# Altium PCB PCB2.PcbDoc
Units mm, origin at the board's own origin, x right, y up, seen from the top; angles counter-clockwise.
Board outline 100 x 100 mm, 2 copper layers (Top Layer, Bottom Layer); 7 components, 16 nets, 76 pads, 4 vias.
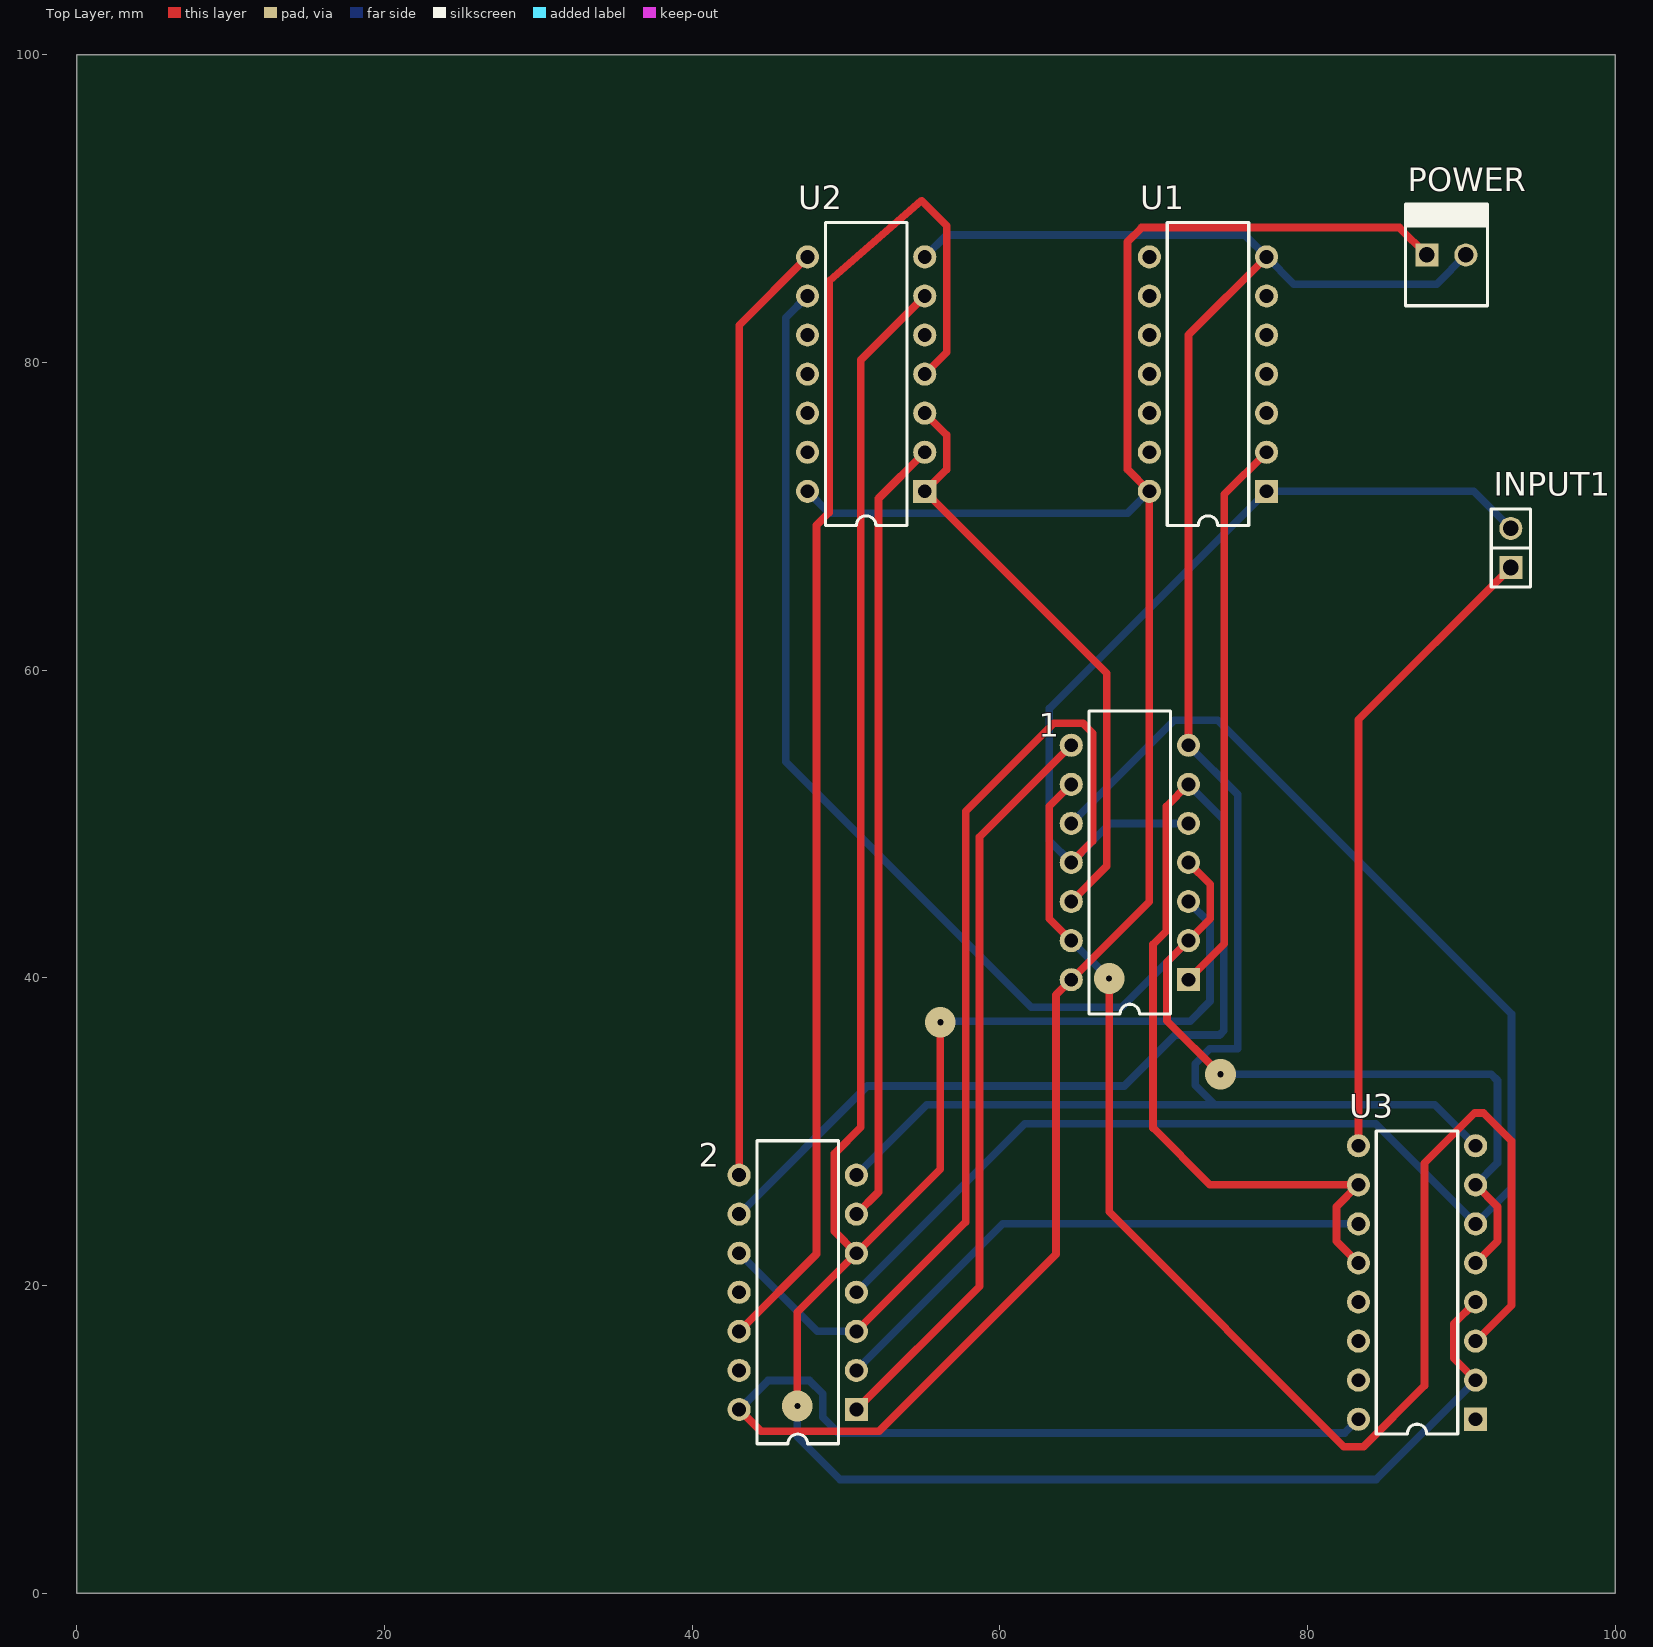
[diagram p0: Top Layer view]
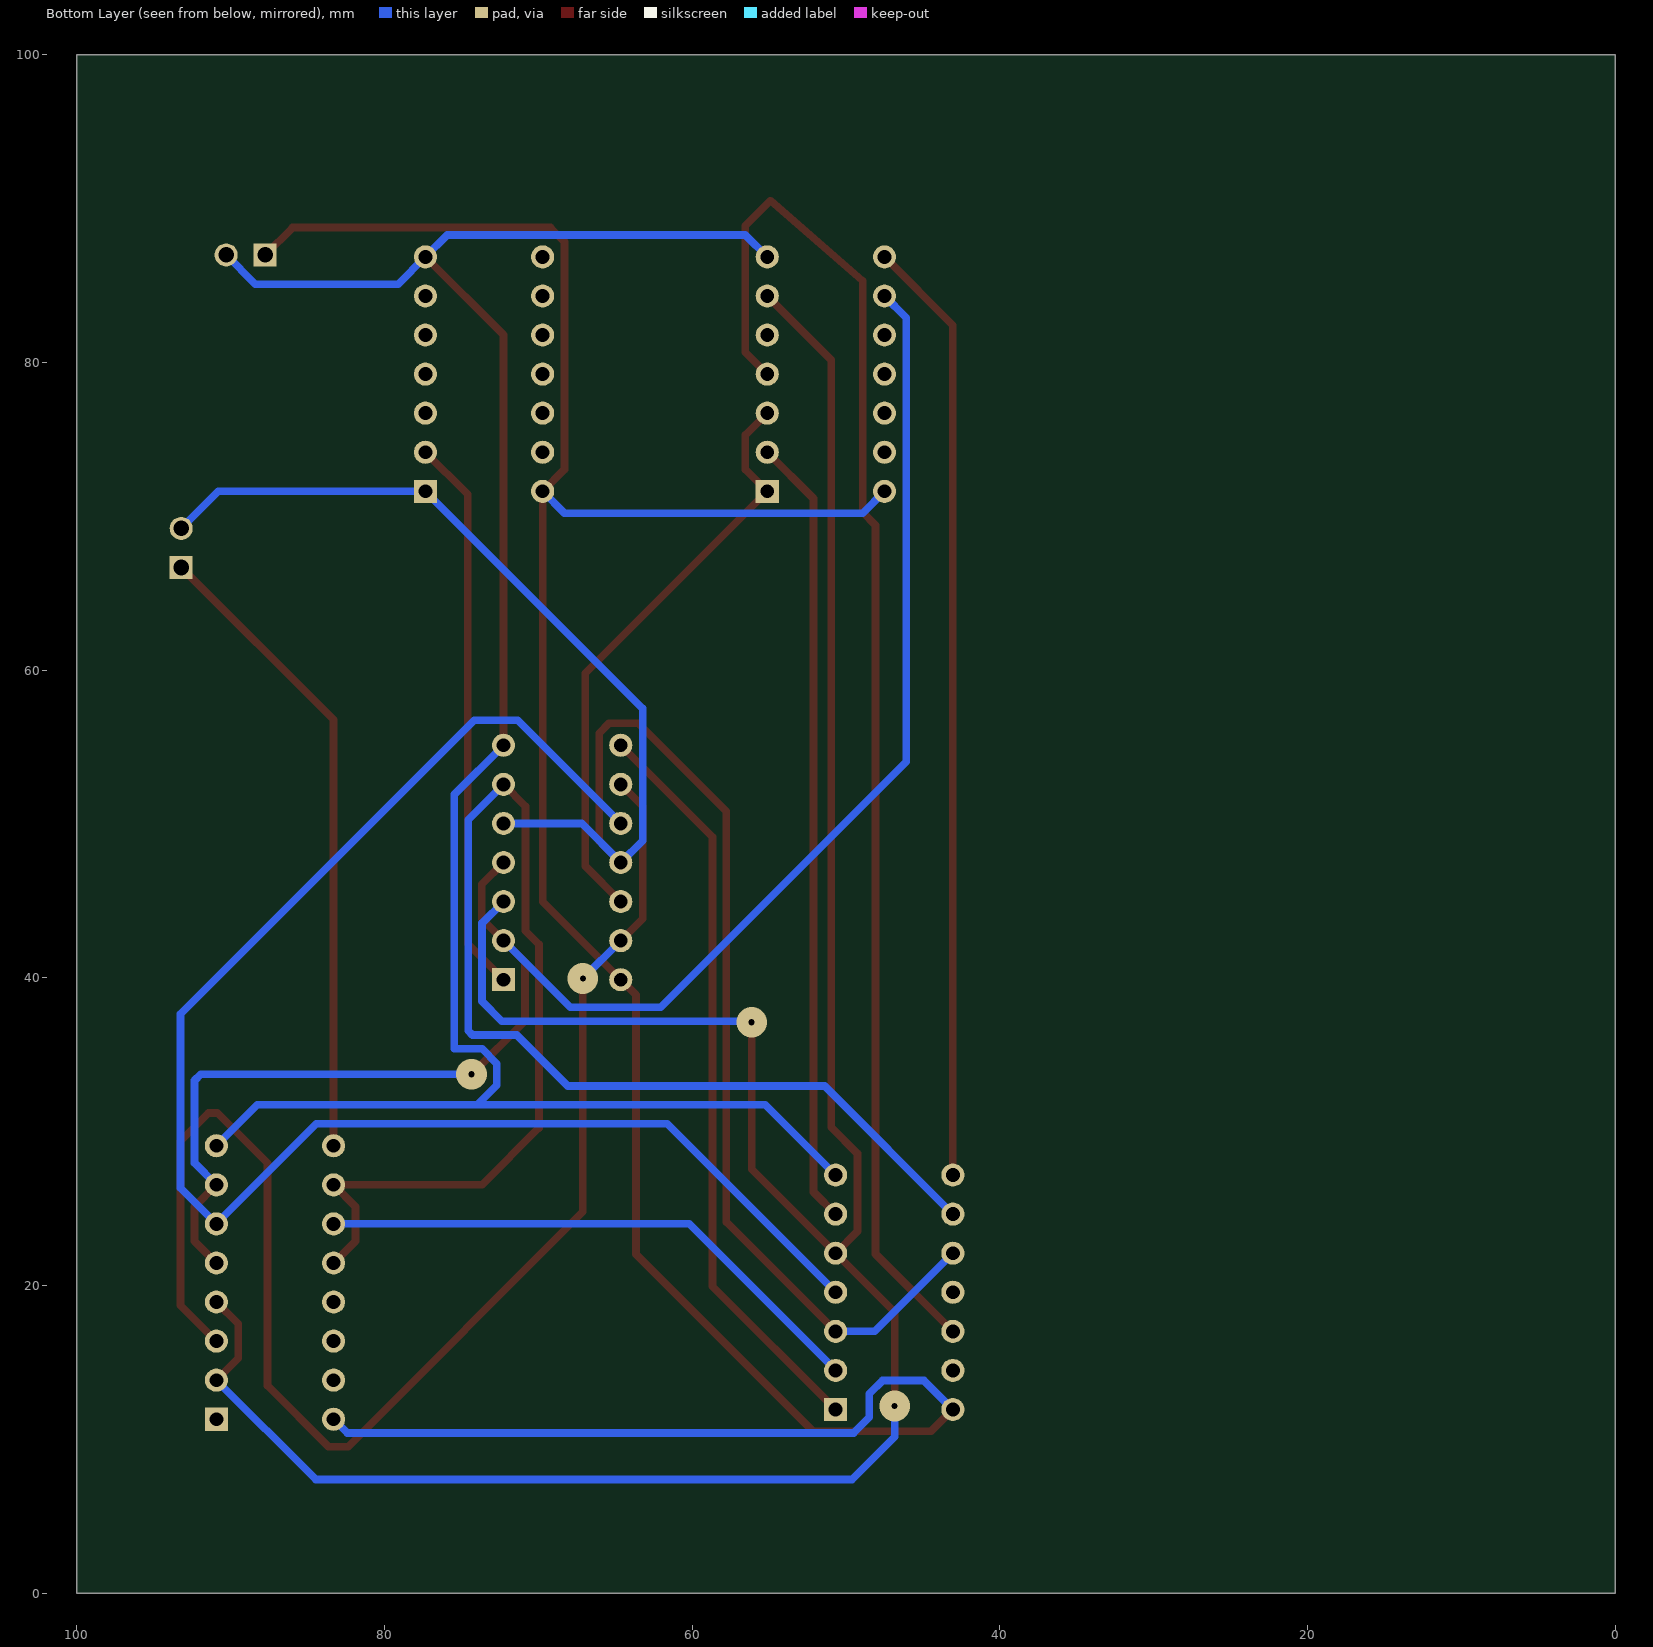
[diagram p1: Bottom Layer view, seen from below]

## Layer stack, top to bottom
Top Solder: solder mask 0.0102, Solder Resist, Dk 3.5
Top Layer: signal copper 0.0356
Dielectric 1: dielectric 0.32, FR-4, Dk 4.8
Bottom Layer: signal copper 0.0356
Bottom Solder: solder mask 0.0102, Solder Resist, Dk 3.5

## Board outline
0,0 100,0 100,100 0,100

## Design rules (kind name [scope] priority, off if disabled: settings)
Clearance [All] p1: gap=0.4 ignorepadtopadclearanceinfootprint=FALSE
PolygonConnect [All] p1: connectstyle=Relief reliefconductorwidth=0.254 reliefentries=4 polygonreliefangle="90 Angle" airgapwidth=0.254
RoutingVias [All] p1: holewidth=0.4 width=2 viastyle="Through Hole" minholewidth=0.3 minwidth=1.5 maxholewidth=0.5 maxwidth=2.1
SolderMaskExpansion [All] p1: expansion=0.102
Width [All] p1: maxlimit=0.6 minlimit=0.4 preferedwidth=0.5
30 further rules are at their usual default settings.

## Components (designator, comment, footprint, x,y, rotation, side; value= is the part's Value field where it differs from the comment)
1 "SN74HC11N" N014 68.453,47.498 r90 top
2 "SN74HC11N" N014 46.863,19.558 r90 top
INPUT1 "CON2" SIP2 93.218,67.945 r90 top
POWER "MOLEX2" MOLEX2 87.757,86.995 r0 top
U1 "SN74HCT04N" N014 73.533,79.248 r90 top
U2 "SN74HC4075N" N014 51.308,79.248 r90 top
U3 "SN74ALS175N" N016 87.122,20.193 r90 top

## Footprints (in the part's own frame and the unit in brackets; to place one, negate y for a bottom-side part, rotate by r counter-clockwise, add the part's x,y. Pads: shape width x height; smd on the part's side, far side on the other; paste and mask are expansions set on the pad)
MOLEX2 [mm]
  rect 1.5x1.5 hole 1.016: 1(0,0)
  round 1.5 hole 1.016: 2(2.54,0)
  silkscreen extent -1.4,-3.3 3.94,3.3, body extent -1.27,-3.17 3.81,3.17, height 10.74
N014 [mm] "DIP; 14 Leads; Row Spacing 7.62 mm; Pitch 2.54 mm"
  rect 1.5x1.5 hole 0.9: 1(-7.62,-3.81)
  round 1.5 hole 0.9: 2(-5.08,-3.81) 3(-2.54,-3.81) 4(0,-3.81) 5(2.54,-3.81) 6(5.08,-3.81) 7(7.62,-3.81) 8(7.62,3.81) 9(5.08,3.81) 10(2.54,3.81) 11(0,3.81) 12(-2.54,3.81) 13(-5.08,3.81) 14(-7.62,3.81)
  silkscreen extent -9.85,-2.65 9.85,2.65
N016 [mm] "DIP; 16 Leads; Row Spacing 7.62 mm; Pitch 2.54 mm"
  rect 1.5x1.5 hole 0.9: 1(-8.89,-3.81)
  round 1.5 hole 0.9: 2(-6.35,-3.81) 3(-3.81,-3.81) 4(-1.27,-3.81) 5(1.27,-3.81) 6(3.81,-3.81) 7(6.35,-3.81) 8(8.89,-3.81) 9(8.89,3.81) 10(6.35,3.81) 11(3.81,3.81) 12(1.27,3.81) 13(-1.27,3.81) 14(-3.81,3.81) 15(-6.35,3.81) 16(-8.89,3.81)
  silkscreen extent -9.85,-2.65 9.85,2.65
SIP2 [mm]
  rect 1.5x1.5 hole 1.016: 1(-1.27,0)
  round 1.5 hole 1.016: 2(1.27,0)
  silkscreen extent -2.54,-1.27 2.54,1.27

## Part data
1 2: "Triple 3-Input Positive-AND Gate", ComponentLink1Description="Manufacturer Link", ComponentLink1URL=http://www.ti.com/, ComponentLink2Description=Datasheet, ComponentLink2URL=http://www-s.ti.com/sc/ds/SN74HC11.pdf, DatasheetVersion=May-1997, LatestRevisionDate=04-Mar-2005, LatestRevisionNote="Stylized 3D Model Added.", PackageDescription="DIP; 14 Leads; Row Spacing 7.62 mm; Pitch 2.54 mm", PackageReference=N014, PackageVersion=Oct-1995, Published=8-Jun-2000, Publisher="Altium Limited"
U1: "Hex Inverter", ComponentLink1Description="Manufacturer Link", ComponentLink1URL=http://www.ti.com/, ComponentLink2Description=Datasheet, ComponentLink2URL=http://www-s.ti.com/sc/ds/SN54HCT04.pdf, DatasheetVersion=May-1997, LatestRevisionDate=04-Mar-2005, LatestRevisionNote="Stylized 3D Model Added.", PackageDescription="DIP; 14 Leads; Row Spacing 7.62 mm; Pitch 2.54 mm", PackageReference=N014, PackageVersion=Oct-1995, Published=8-Jun-2000, Publisher="Altium Limited"
U2: "Triple 3-Input Positive-OR Gate", ComponentLink1Description="Manufacturer Link", ComponentLink1URL=http://www.ti.com/, ComponentLink2Description=Datasheet, ComponentLink2URL=http://www-s.ti.com/sc/ds/sn74hc4075.pdf, DatasheetVersion=Sep-1987, LatestRevisionDate=04-Mar-2005, LatestRevisionNote="Stylized 3D Model Added.", PackageDescription="DIP; 14 Leads; Row Spacing 7.62 mm; Pitch 2.54 mm", PackageReference=N014, PackageVersion=Oct-1995, Published=8-Jun-2000, Publisher="Altium Limited"
U3: "Hex/Quadruple D-Type Flip-Flop with Clear", Code_JEDEC=MS-001-BB, ComponentLink1Description="Manufacturer Link", ComponentLink1URL=http://www.ti.com/, ComponentLink2Description=Datasheet, ComponentLink2URL=http://www-s.ti.com/sc/ds/sn54als175.pdf, DatasheetVersion=Dec-1994, LatestRevisionDate=04-Mar-2005, LatestRevisionNote="Stylized 3D Model Added.", PackageDescription="DIP; 16 Leads; Row Spacing 7.62 mm; Pitch 2.54 mm", PackageReference=N016, PackageVersion=Oct-1995, Published=8-Jun-2000, Publisher="Altium Limited"

## Via types
v1: diameter 2, hole 0.4, Top Layer to Bottom Layer, 4 vias

## Nets (pads, with @x,y where several pads share a name; then routed paths per layer and width w, separated by ;. In a path a pad name is that pad's centre, name@x,y a point inside that pad or via, vN(x,y) a via of type N, cw(c..) or ccw(c..) an arc to the next point about the centre after c; other vN are vias at no path point)
Clock: INPUT1.1 U3.9 | length 41.7
  Top Layer w0.5: U3.9 83.312,56.769 INPUT1.1
GND: 1.7 2.7 POWER.2 U1.7 U2.7 U3.8 | length 142.4
  Top Layer w0.5: 1.7 72.263,81.788 U1.7
  Bottom Layer w0.5: 2.7 55.245,31.75 73.966,31.75 ; U2.7 56.54,88.29 75.921,88.29 U1.7 79.121,85.09 88.392,85.09 POWER.2 ; 1.7 75.463,51.918 75.463,35.381 73.66,35.381 72.696,34.417 72.696,33.02 73.966,31.75 ; U3.8 88.265,31.75 73.966,31.75
Net1_8: 1.8 2.1 | length 49
  Top Layer w0.5: 2.1 58.684,19.949 58.684,49.159 1.8
Net1_12: 1.12 U2.1 U2.3 | length 38.8
  Top Layer w0.5: U2.3 56.54,75.286 56.54,73.05 U2.1 66.954,59.792 66.954,47.269 1.12
Net2_6: 2.6 U2.2 | length 51.4
  Top Layer w0.5: 2.6 52.112,26.077 52.112,71.162 U2.2
Net2_8: 2.8 U2.8 | length 61.5
  Top Layer w0.5: 2.8 43.053,82.423 U2.8
Net2_12: 2.12 U2.4 | length 91.2
  Top Layer w0.5: 2.12 48.082,22.047 48.082,69.418 48.92,70.256 48.92,85.319 54.915,90.526 56.54,88.9 56.54,80.67 U2.4
VCC: 1.14 2.14 POWER.1 U1.14 U2.14 U3.16 | length 182.6
  Top Layer w0.5: 2.14 44.475,10.516 52.146,10.516 63.652,22.022 63.652,38.887 1.14 69.723,44.958 U1.14 68.301,73.05 68.301,87.859 69.215,88.773 85.979,88.773 POWER.1
  Bottom Layer w0.5: 2.14 44.932,13.817 47.625,13.817 48.488,12.954 48.488,11.43 49.504,10.414 82.423,10.414 U3.16 ; U2.14 48.92,70.206 68.301,70.206 U1.14
W: 1.5 1.11 2.3 2.10 INPUT1.2 U1.1 | length 122.5
  Top Layer w0.5: 2.3 57.784,24.129 57.784,50.824 63.5,56.54 65.405,56.54 66.043,55.902 66.043,48.898 1.11
  Bottom Layer w0.5: 2.10 48.133,17.018 2.3 ; 1.5 67.183,50.038 1.11 63.221,48.92 63.221,57.506 U1.1 90.805,71.628 INPUT1.2
Wneg: 1.1 U1.2 | length 36.4
  Top Layer w0.5: 1.1 74.6,42.215 74.6,71.425 U1.2
Y1: 1.3 2.5 U2.6 U3.2 U3.4 | length 175.4
  Top Layer w0.5: v1(46.838,12.167) 46.838,18.263 2.5 ; U2.6 50.952,80.162 50.952,30.277 49.251,28.575 49.251,23.52 2.5 ; v1(56.134,37.109) 56.134,27.559 2.5 ; U3.2 89.51,15.265 89.51,17.501 U3.4
  Bottom Layer w0.5: v1(46.838,12.167) 46.838,10.16 49.606,7.391 84.48,7.391 U3.2 ; v1(56.134,37.109) 56.206,37.181 72.366,37.181 73.663,38.478 73.663,43.558 1.3
y1neg: 1.9 1.13 U3.3 | length 94.7
  Top Layer w0.5: 1.13 63.221,43.84 63.221,51.156 1.9 ; v1(67.107,39.954) 67.107,24.79 82.372,9.525 83.642,9.525 87.605,13.487 87.605,27.94 90.881,31.217 91.44,31.217 93.269,29.388 93.269,18.72 U3.3
  Bottom Layer w0.5: 1.13 v1(67.107,39.954)
Y2: 1.2 1.4 U2.9 U3.5 U3.7 | length 114.2
  Top Layer w0.5: 1.4 73.685,46.076 73.685,43.84 1.2 70.863,41.018 70.863,37.214 v1(74.346,33.731) ; U3.5 92.354,22.885 92.354,25.121 U3.7
  Bottom Layer w0.5: U2.9 46.076,82.906 46.076,54.051 62.041,38.086 67.931,38.086 1.2 ; v1(74.346,33.731) 91.948,33.731 92.354,33.325 92.354,27.965 U3.7
y2neg: 1.10 2.4 U3.6 | length 101.4
  Bottom Layer w0.5: 2.4 61.62,30.505 84.43,30.505 U3.6 93.269,26.34 93.269,37.643 74.168,56.744 71.349,56.744 1.10
Y3: 1.6 2.9 U3.10 U3.12 | length 97.8
  Top Layer w0.5: 1.6 70.841,51.156 70.841,43.056 69.963,42.178 69.963,30.24 73.66,26.543 U3.10 81.89,25.121 81.89,22.885 U3.12
  Bottom Layer w0.5: 2.9 51.384,32.969 68.098,32.969 71.41,36.281 74.28,36.281 74.563,36.565 74.563,50.278 1.6
y3neg: 2.2 U3.11 | length 36.6
  Bottom Layer w0.5: 2.2 60.198,24.003 U3.11
pads on no net: 2.11 2.13 U1.3 U1.4 U1.5 U1.6 U1.8 U1.9 U1.10 U1.11 U1.12 U1.13 U2.5 U2.10 U2.11 U2.12 U2.13 U3.1 U3.13 U3.14 U3.15